# EAGLE board MacroPad (EAGLE 9.4.0)
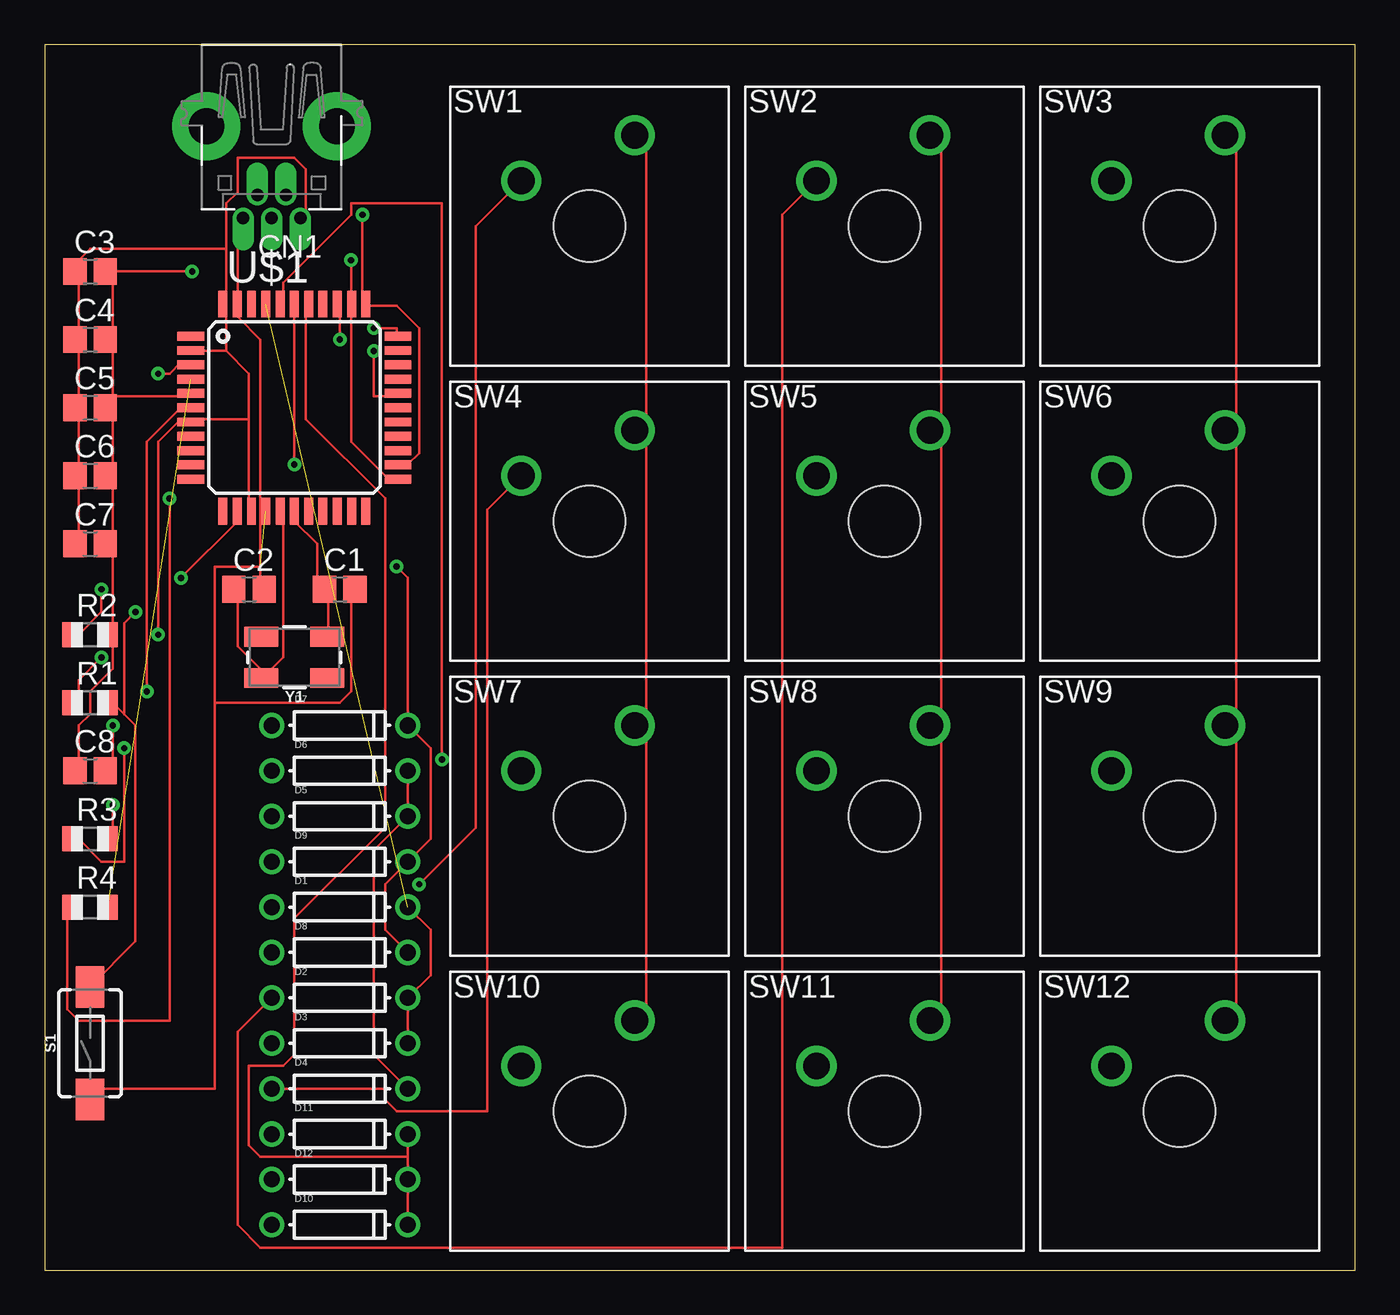
[diagram p0: board, top side]
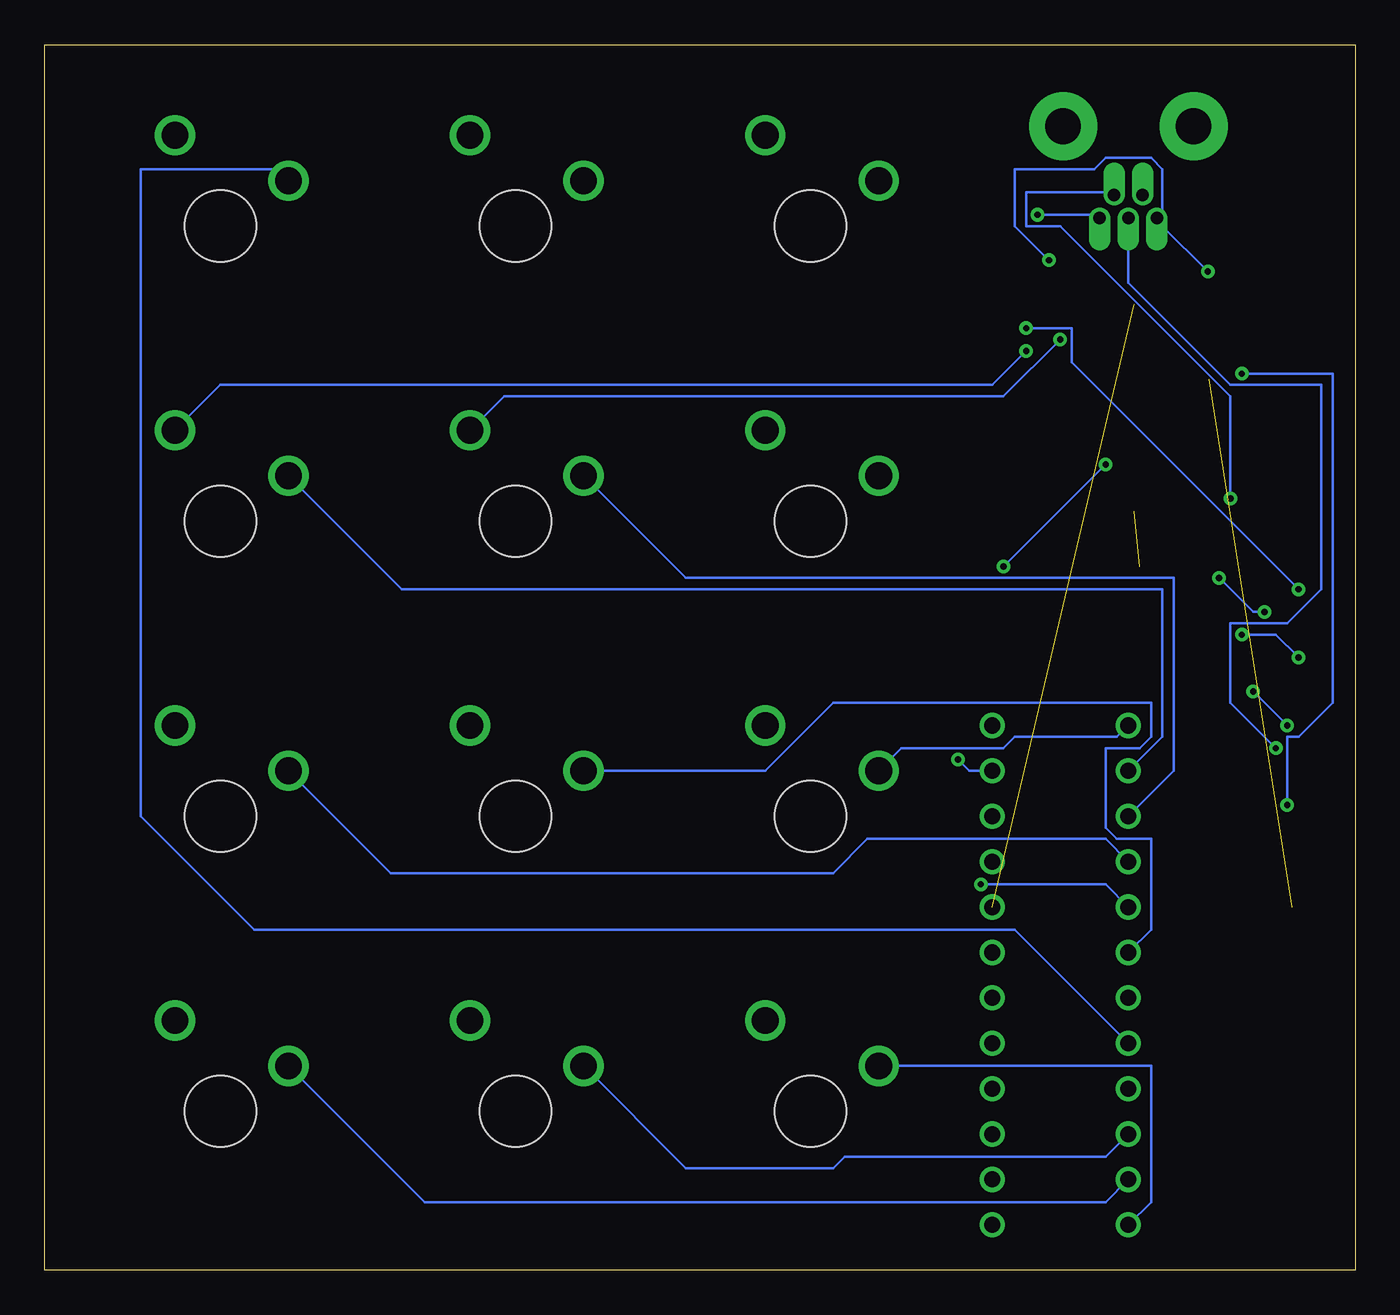
[diagram p1: board, bottom side, seen from below]

Size 73.33 x 68.57 mm. Coordinates in mm from the lower left corner, seen from the top.
Outline: 0,0 73.33,0 73.33,68.57 0,68.57 0,0
Copper layers (1*16): Top 0.035mm / dielectric 1.5mm / Bottom 0.035mm
Design rules "default": minimum track width 6mil, minimum drill 0.35mm, track to track 6mil, track to pad 6mil, pad to pad 6mil, via to via 6mil, smd to smd 6mil, copper to edge 40mil, drill to drill 6mil, minimum pad ring 10mil, minimum via ring 8mil, stop-mask expansion 4mil, vias tented up to drill 0mil, thermal gap 10mil

## Footprints (pad centres in the part's own frame; a part is rotated, then mirrored left to right if it is on the bottom)
C0805 = smd 1.3 x 1.5: 1 -0.85,0; 2 0.85,0
USB-MINIB-THM-MOLEX = drill 0.7 offset: D+ 0,9.72; D- -0.8,8.42; GND 1.6,9.72; ID 0.8,8.42; VBUS -1.6,9.72 | drill 2 pad 3.81: GND1 -3.65,4.57; GND4 3.65,4.57
DO-1N4148 = drill 0.9: A -3.81,0; C 3.81,0
R0805 = smd 1.1 x 1.4: 1 -1,0; 2 1,0
TACTILE_SWITCH_SMD_6.0X3.5MM = smd 2.3 x 1.6: 1 -3.15,0; 2 3.15,0
MX1A-XXNN = drill 1.5: 1 -3.81,2.54; 2 2.54,5.08 | hole 4: 0,0
TQFP44 = smd 1.5 x 0.5: 1 -5.8,4; 2 -5.8,3.2; 3 -5.8,2.4; 4 -5.8,1.6; 5 -5.8,0.8; 6 -5.8,0; 7 -5.8,-0.8; 8 -5.8,-1.6; 9 -5.8,-2.4; 10 -5.8,-3.2; 11 -5.8,-4; 23 5.8,-4; 24 5.8,-3.2; 25 5.8,-2.4; 26 5.8,-1.6; 27 5.8,-0.8; 28 5.8,0; 29 5.8,0.8; 30 5.8,1.6; 31 5.8,2.4; 32 5.8,3.2; 33 5.8,4 | smd 0.5 x 1.5: 12 -4,-5.8; 13 -3.2,-5.8; 14 -2.4,-5.8; 15 -1.6,-5.8; 16 -0.8,-5.8; 17 0,-5.8; 18 0.8,-5.8; 19 1.6,-5.8; 20 2.4,-5.8; 21 3.2,-5.8; 22 4,-5.8; 34 4,5.8; 35 3.2,5.8; 36 2.4,5.8; 37 1.6,5.8; 38 0.8,5.8; 39 0,5.8; 40 -0.8,5.8; 41 -1.6,5.8; 42 -2.4,5.8; 43 -3.2,5.8; 44 -4,5.8
CRYSTAL-SMD-5X3.2-4PAD = smd 1.9 x 1.1: 1 -1.85,-1.15; 2 1.85,-1.15; 3 1.85,1.15; 4 -1.85,1.15

## Placement (x,y rotation side)
C1  22p  [C0805]  16.51,38.1 0 top
C2  22p  [C0805]  11.43,38.1 0 top
C3  0.1u  [C0805]  2.54,55.88 0 top
C4  0.1u  [C0805]  2.54,52.07 0 top
C5  0.1u  [C0805]  2.54,48.26 0 top
C6  0.1u  [C0805]  2.54,44.45 0 top
C7  4.7u  [C0805]  2.54,40.64 0 top
C8  1u  [C0805]  2.54,27.94 0 top
CN1  [USB-MINIB-THM-MOLEX]  12.7,68.58 180 top
D1  [DO-1N4148]  16.51,20.32 0 top
D2  [DO-1N4148]  16.51,15.24 0 top
D3  [DO-1N4148]  16.51,12.7 0 top
D4  [DO-1N4148]  16.51,10.16 0 top
D5  [DO-1N4148]  16.51,25.4 0 top
D6  [DO-1N4148]  16.51,27.94 0 top
D7  [DO-1N4148]  16.51,30.48 0 top
D8  [DO-1N4148]  16.51,17.78 0 top
D9  [DO-1N4148]  16.51,22.86 0 top
D10  [DO-1N4148]  16.51,2.54 0 top
D11  [DO-1N4148]  16.51,7.62 0 top
D12  [DO-1N4148]  16.51,5.08 0 top
R1  10k  [R0805]  2.54,31.75 0 top
R2  10k  [R0805]  2.54,35.56 0 top
R3  22  [R0805]  2.54,24.13 0 top
R4  22  [R0805]  2.54,20.32 0 top
S1  MOMENTARY-SWITCH-SPST-SMD-6.0X3.5MM  [TACTILE_SWITCH_SMD_6.0X3.5MM]  2.54,12.7 90 top
SW1  CHERRY_MX  [MX1A-XXNN]  30.48,58.42 0 top
SW2  CHERRY_MX  [MX1A-XXNN]  46.99,58.42 0 top
SW3  CHERRY_MX  [MX1A-XXNN]  63.5,58.42 0 top
SW4  CHERRY_MX  [MX1A-XXNN]  30.48,41.91 0 top
SW5  CHERRY_MX  [MX1A-XXNN]  46.99,41.91 0 top
SW6  CHERRY_MX  [MX1A-XXNN]  63.5,41.91 0 top
SW7  CHERRY_MX  [MX1A-XXNN]  30.48,25.4 0 top
SW8  CHERRY_MX  [MX1A-XXNN]  46.99,25.4 0 top
SW9  CHERRY_MX  [MX1A-XXNN]  63.5,25.4 0 top
SW10  CHERRY_MX  [MX1A-XXNN]  30.48,8.89 0 top
SW11  CHERRY_MX  [MX1A-XXNN]  46.99,8.89 0 top
SW12  CHERRY_MX  [MX1A-XXNN]  63.5,8.89 0 top
U$1  ATMEGA32U4-AU  [TQFP44]  13.97,48.26 0 top
Y1  [CRYSTAL-SMD-5X3.2-4PAD]  13.97,34.29 180 top

## Library data of the parts
C1-C8 CN1 D1-D12 R2 U$1 = adafruit
R1 R3 R4 = adafruit; SPICEPREFIX: R
S1 = SparkFun-Switches; PROD_ID: SWCH-00815; SF_SKU: COM-08229; SPICEPREFIX: B
SW1-SW12 = Cherry_MX_v7.0
Y1 = SparkFun-Clocks

## Nets
COL0: U$1.37
COL1: SW2.2 SW5.2 SW8.2 SW11.2 U$1.36
COL2: SW3.2 SW6.2 SW9.2 SW12.2 U$1.29
GND: C1.2 C2.2 C3.2 C4.2 C5.2 C6.2 C7.2 C8.1 CN1.GND R2.2 S1.1 U$1.5 U$1.15 U$1.23 U$1.35 U$1.43
N$1: C2.1 U$1.16 Y1.3
N$2: R2.1 U$1.33
N$3: C8.2 U$1.6
N$4: C1.1 U$1.17 Y1.1
N$5: R1.2 S1.2 U$1.13
N$6: CN1.D+ R3.1
N$7: R3.2 U$1.3
N$8: R4.2 U$1.4
N$9: CN1.D- R4.1
N$14: D1.A SW1.1
N$15: D2.A SW2.1
N$16: D3.A SW3.1
N$18: SW1.2 SW4.2 SW7.2 SW10.2
N$22: D7.A SW7.1
N$23: D8.A SW8.1
N$24: D9.A SW9.1
N$27: D10.A SW10.1
N$28: D11.A SW11.1
N$29: D12.A SW12.1
N$31: D4.A SW4.1
N$32: D5.A SW5.1
N$33: D6.A SW6.1
ROW0: D1.C D2.C D3.C U$1.41
ROW1: D4.C D5.C D6.C U$1.40
ROW2: D7.C D8.C D9.C U$1.39
ROW3: D10.C D11.C D12.C U$1.38
VCC: C3.1 C4.1 C5.1 C6.1 C7.1 CN1.VBUS R1.1 U$1.2 U$1.7 U$1.14 U$1.24 U$1.34 U$1.44

## Tracks (layer width: path | path; a pad name or v marks a point on that pad's centre or on a via)
COL1  (via drill 0.35)
  Top 0.152: SW11.2 50.16,14.61 50.16,29.84 SW8.2 50.16,31.11 50.16,47.62 | v16.51,52.07 16.51,53.98 U$1.36 | SW2.2 50.16,62.87 50.16,47.62 | 50.16,47.62 SW5.2
  Bottom 0.152: v16.51,52.07 19.68,48.9 47.62,48.9 SW5.2
COL2  (via drill 0.35)
  Top 0.152: SW12.2 66.67,14.61 66.67,29.84 SW9.2 66.67,31.11 66.67,47.62 | v18.41,51.44 18.41,48.9 19.68,48.9 U$1.29 | SW3.2 66.67,62.87 66.67,47.62 | 66.67,47.62 SW6.2
  Bottom 0.152: v18.41,51.44 20.32,49.53 63.5,49.53 SW6.2
GND  (via drill 0.35)  (1 unrouted)
  Top 0.152: 3.81,40.64 3.81,35.56 | 3.81,35.56 3.81,33.66 2.54,32.38 2.54,31.11 1.91,30.48 1.91,27.94 C8.1 | 3.81,35.56 R2.2 | 3.81,48.26 3.81,44.45 | 3.81,48.9 7.62,48.9 U$1.5 | 3.81,48.26 3.81,48.9 | 3.81,48.26 C5.2 3.81,48.9 | 3.81,48.9 3.81,52.07 | 3.81,52.07 3.81,55.88 | 3.81,52.07 C4.2 | 3.81,44.45 3.81,40.64 | 3.81,40.64 C7.2 | 3.81,44.45 C6.2 | U$1.23 19.68,44.45 19.05,44.45 17.14,46.35 17.14,53.98 U$1.35 17.14,54.61 v17.14,56.52 | CN1.GND 10.79,58.42 10.79,54.61 U$1.43 10.79,53.98 10.79,53.34 12.06,52.07 12.06,39.37 | 12.06,39.37 12.06,38.1 C2.2 | 9.53,31.75 16.51,31.75 17.14,32.38 17.14,38.1 C1.2 | 9.53,31.75 9.53,39.37 12.06,39.37 | 9.53,31.75 9.53,10.16 2.54,10.16 S1.1 | v8.26,55.88 3.81,55.88 | 3.81,55.88 C3.2
  Bottom 0.152: v17.14,56.52 19.05,58.42 19.05,61.59 14.61,61.59 13.97,62.23 11.43,62.23 10.79,61.59 10.79,59.05 CN1.GND 10.79,58.42 v8.26,55.88
N$1
  Top 0.152: C2.1 10.79,38.1 10.79,34.92 12.06,33.66 Y1.3 12.7,33.66 13.34,34.29 13.34,41.91 U$1.16
N$2  (via drill 0.35)
  Top 0.152: v3.17,38.1 3.17,36.83 1.91,35.56 R2.1 | v18.41,52.7 19.68,52.7 19.68,52.07 U$1.33
  Bottom 0.152: v3.17,38.1 15.88,50.8 15.88,52.7 v18.41,52.7
N$3  (via drill 0.35)
  Top 0.152: v3.81,30.48 3.81,27.94 C8.2 | v5.71,32.38 5.71,46.35 7.62,48.26 U$1.6
  Bottom 0.152: v5.71,32.38 v3.81,30.48
N$4
  Top 0.152: Y1.1 15.88,35.56 15.88,38.1 C1.1 15.24,38.1 15.24,40.64 13.97,41.91 U$1.17
N$5  (via drill 0.35)
  Top 0.152: 4.45,31.11 5.08,30.48 5.08,18.41 2.54,15.88 S1.2 | 4.45,31.11 3.81,31.75 R1.2 | v7.62,38.73 10.79,41.91 U$1.13 | v5.08,36.83 4.45,36.2 4.45,31.11
  Bottom 0.152: v7.62,38.73 5.71,36.83 v5.08,36.83
N$6  (via drill 0.35)
  Top 0.152: v4.45,29.21 4.45,22.86 3.17,22.86 1.91,24.13 R3.1
  Bottom 0.152: v4.45,29.21 6.99,31.75 6.99,36.2 3.81,36.2 1.91,38.1 1.91,49.53 6.99,49.53 12.7,55.24 CN1.D+
N$7  (via drill 0.35)
  Top 0.152: v3.81,26.04 3.81,24.13 R3.2 | v6.35,50.16 6.99,50.16 7.62,50.8 U$1.3
  Bottom 0.152: v3.81,26.04 3.81,29.84 3.17,29.84 1.27,31.75 1.27,50.16 v6.35,50.16
N$8  (1 unrouted)
N$9  (via drill 0.35)
  Top 0.152: v6.99,43.18 6.99,13.97 1.91,13.97 1.27,14.61 1.27,20.32 R4.1
  Bottom 0.152: v6.99,43.18 6.99,48.9 16.51,58.42 18.41,58.42 18.41,60.33 13.97,60.33 CN1.D-
N$14  (via drill 0.35)
  Top 0.152: v20.95,21.59 24.13,24.77 24.13,58.42 SW1.1
  Bottom 0.152: D1.A 13.97,21.59 v20.95,21.59
N$15
  Top 0.152: D2.A 10.79,13.34 10.79,2.54 12.06,1.27 41.27,1.27 41.27,59.05 SW2.1
N$16
  Bottom 0.152: D3.A 19.05,19.05 61.59,19.05 67.94,25.4 67.94,61.59 60.33,61.59 SW3.1
N$18
  Top 0.152: SW10.2 33.66,14.61 33.66,29.84 | 33.66,29.84 33.66,46.35 | 33.66,29.84 SW7.2 | SW1.2 33.66,62.87 33.66,46.35 | 33.66,46.35 SW4.2
N$22
  Bottom 0.152: D7.A 13.34,29.84 19.05,29.84 19.68,29.21 25.4,29.21 SW7.1
N$23
  Bottom 0.152: D8.A 11.43,19.05 11.43,24.13 13.34,24.13 13.97,24.77 13.97,29.21 12.06,29.21 11.43,29.84 11.43,31.75 29.21,31.75 33.02,27.94 SW8.1
N$24
  Bottom 0.152: D9.A 13.97,24.13 27.3,24.13 29.21,22.23 53.98,22.23 SW9.1
N$27
  Bottom 0.152: D10.A 11.43,3.81 11.43,11.43 SW10.1
N$28
  Bottom 0.152: D11.A 13.97,6.35 28.57,6.35 29.21,5.71 37.47,5.71 SW11.1
N$29
  Bottom 0.152: D12.A 13.97,3.81 52.07,3.81 SW12.1
N$31
  Top 0.152: D4.A 19.05,10.16 19.05,9.53 19.68,8.89 24.77,8.89 24.77,42.55 SW4.1
N$32
  Bottom 0.152: D5.A 10.16,27.94 10.16,38.73 37.47,38.73 SW5.1
N$33
  Bottom 0.152: D6.A 10.79,29.84 10.79,38.1 53.34,38.1 SW6.1
ROW0  (1 unrouted)
  Top 0.152: D3.C D2.C 21.59,16.51 21.59,19.05 D1.C
ROW1  (via drill 0.35)
  Top 0.152: D4.C 18.41,12.06 18.41,23.5 D5.C D6.C | v22.23,28.57 22.23,59.69 17.14,59.69 17.14,59.05 13.34,55.24 13.34,54.61 U$1.40
  Bottom 0.152: v22.23,28.57 21.59,27.94 D6.C
ROW2  (via drill 0.35)
  Top 0.152: D8.C 19.05,19.05 19.05,21.59 D9.C 21.59,24.13 21.59,29.21 D7.C 20.32,38.73 v19.68,39.37 | v13.97,45.09 U$1.39
  Bottom 0.152: v19.68,39.37 v13.97,45.09
ROW3
  Top 0.152: D10.C D12.C 20.32,6.35 | 20.32,6.35 12.06,6.35 11.43,6.99 11.43,11.43 13.34,11.43 13.97,12.06 13.97,19.68 19.05,24.77 19.05,43.18 14.61,47.62 14.61,53.98 U$1.38 | D11.C 20.32,6.35
VCC  (via drill 0.35)
  Top 0.152: v3.17,34.29 1.91,33.02 1.91,31.75 R1.1 | v6.35,35.56 6.35,46.35 7.62,47.62 U$1.7 8.26,47.62 11.43,47.62 | 1.91,44.45 1.91,40.64 C7.1 | 1.91,52.07 1.91,48.26 | 1.91,52.07 1.91,55.88 | 1.91,52.07 C4.1 | 1.91,48.26 1.91,44.45 | 1.91,44.45 C6.1 | 1.91,48.26 C5.1 | U$1.24 20.32,45.09 20.95,45.72 20.95,52.7 19.68,53.98 17.78,53.98 U$1.34 17.78,54.61 v17.78,59.05 | 10.16,51.44 8.26,51.44 U$1.2 | 10.16,51.44 10.16,53.98 U$1.44 10.16,54.61 10.16,57.15 | 11.43,47.62 11.43,50.16 10.16,51.44 | 11.43,47.62 11.43,42.55 U$1.14 | 10.16,57.15 10.16,59.69 10.79,60.33 10.79,62.23 13.97,62.23 14.61,61.59 14.61,59.05 CN1.VBUS | 1.91,55.88 1.91,56.52 2.54,57.15 10.16,57.15 | 1.91,55.88 C3.1
  Bottom 0.152: v3.17,34.29 4.45,35.56 v6.35,35.56 | v17.78,59.05 14.61,59.05 CN1.VBUS